# EAGLE board naiLED_eagle-pannel (EAGLE 8.2.2)
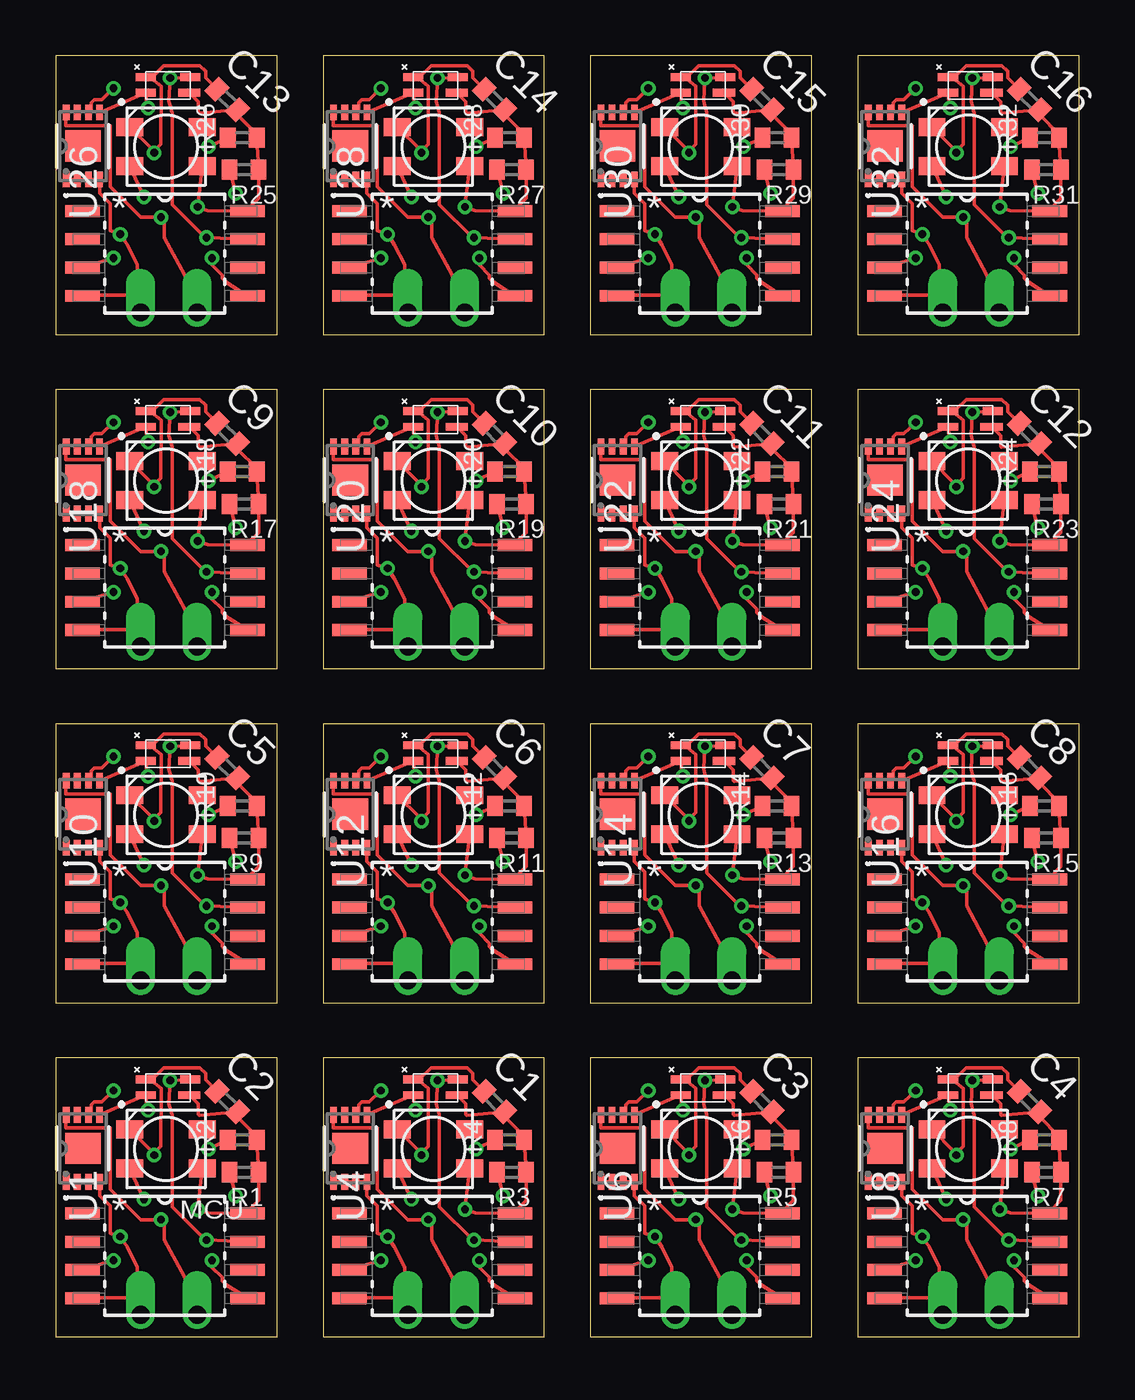
[diagram p0: board, top side]
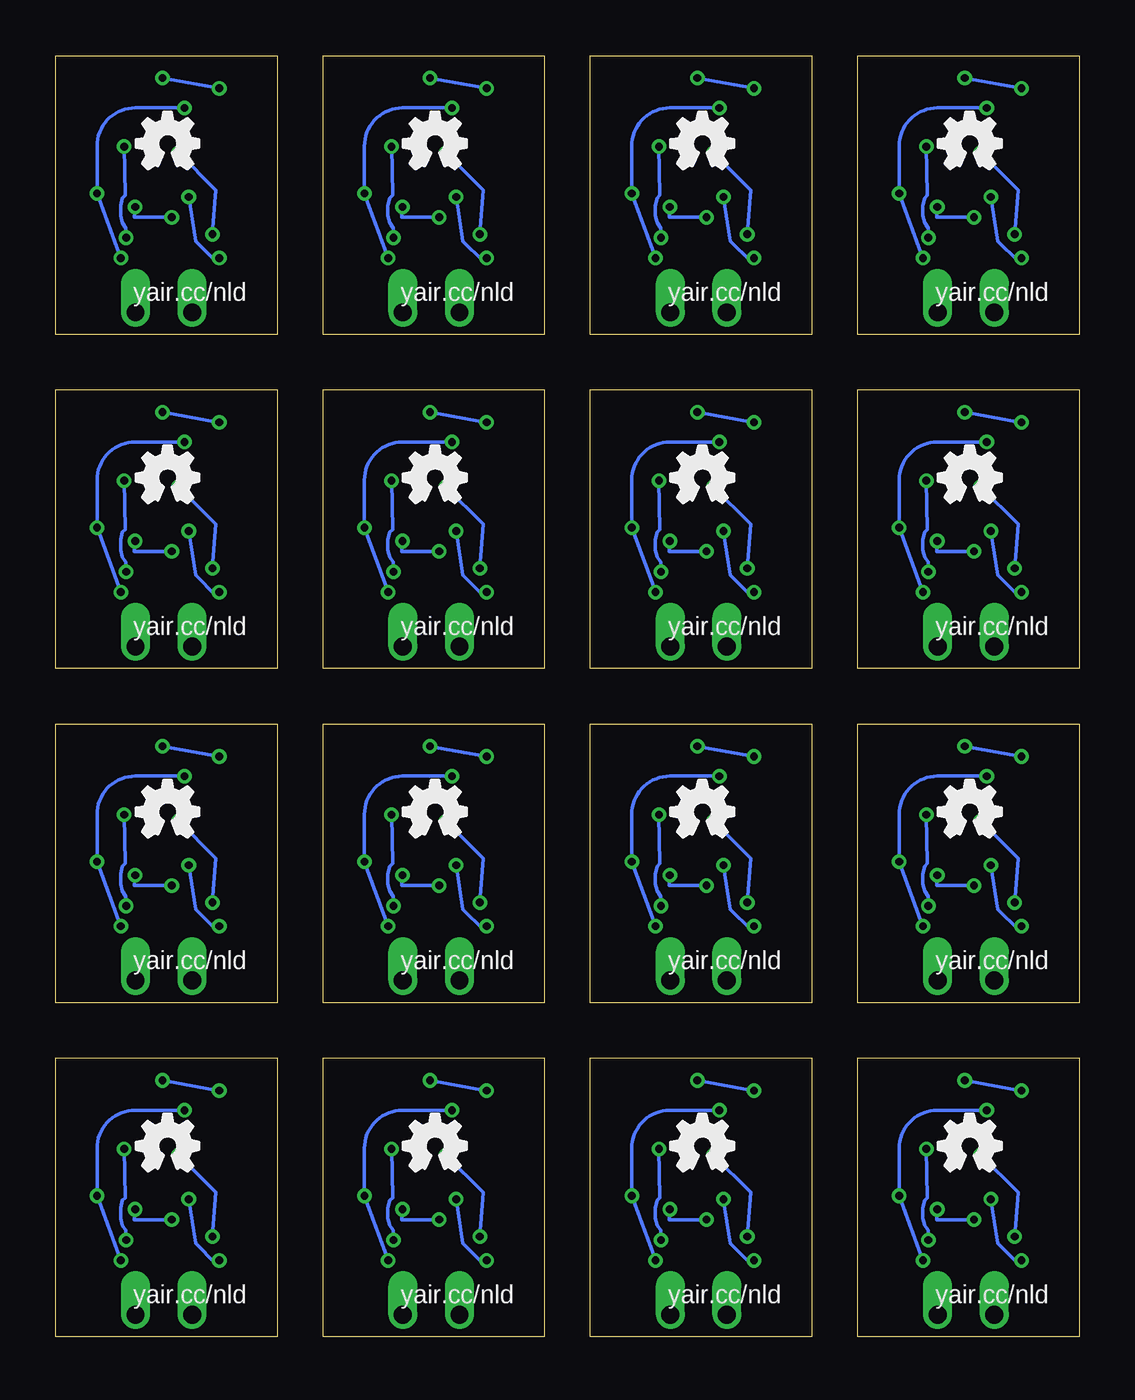
[diagram p1: board, bottom side, seen from below]

Size 45.93 x 57.52 mm. Coordinates in mm from the lower left corner, seen from the top.
Outline: 0,0 9.93,0 9.93,12.52 0,12.52 0,0
Outline: 12,0 21.93,0 21.93,12.52 12,12.52 12,0
Outline: 24,0 33.93,0 33.93,12.52 24,12.52 24,0
Outline: 36,0 45.93,0 45.93,12.52 36,12.52 36,0
Outline: 0,15 9.93,15 9.93,27.52 0,27.52 0,15
Outline: 12,15 21.93,15 21.93,27.52 12,27.52 12,15
Outline: 24,15 33.93,15 33.93,27.52 24,27.52 24,15
Outline: 36,15 45.93,15 45.93,27.52 36,27.52 36,15
Outline: 0,30 9.93,30 9.93,42.52 0,42.52 0,30
Outline: 12,30 21.93,30 21.93,42.52 12,42.52 12,30
Outline: 24,30 33.93,30 33.93,42.52 24,42.52 24,30
Outline: 36,30 45.93,30 45.93,42.52 36,42.52 36,30
Outline: 0,45 9.93,45 9.93,57.52 0,57.52 0,45
Outline: 12,45 21.93,45 21.93,57.52 12,57.52 12,45
Outline: 24,45 33.93,45 33.93,57.52 24,57.52 24,45
Outline: 36,45 45.93,45 45.93,57.52 36,57.52 36,45
Copper layers (1*16): Top 0.035mm / dielectric 1.5mm / Bottom 0.035mm
Design rules "Elecrow_2-layer_eagle_rule *": minimum track width 6mil, minimum drill 12mil, track to track 5mil, track to pad 5mil, pad to pad 5mil, via to via 5mil, smd to smd 0mil, copper to edge 10mil, drill to drill 10mil, minimum pad ring 10mil, minimum via ring 6mil, stop-mask expansion 2mil, vias tented up to drill 100mil, thermal gap 10mil

## Footprints (pad centres in the part's own frame; a part is rotated, then mirrored left to right if it is on the bottom)
C402 = smd 0.7 x 0.9: 1 -0.65,0; 2 0.65,0
R402 = smd 0.7 x 0.9: 1 -0.65,0; 2 0.65,0
8MA2 = smd 0.705 x 0.3: 1 -1.502,0.75; 2 -1.502,0.25; 3 -1.502,-0.25; 4 -1.502,-0.75; 5 1.502,-0.75; 6 1.502,-0.25; 7 1.502,0.25; 8 1.502,0.75 | smd 1.4 x 1.6: 9 0,0
SOIC127P798X216-8N = smd 1.549 x 0.533: 1 -3.708,1.905; 2 -3.708,0.635; 3 -3.708,-0.635; 4 -3.708,-1.905; 5 3.708,-1.905; 6 3.708,-0.635; 7 3.708,0.635; 8 3.708,1.905
LED-3535 = smd 1.2 x 0.8: 1 -1.625,0.875; 2 -1.625,-0.875; 3 1.625,-0.875; 4 1.625,0.875
4-TFLGA = smd 0.9 x 0.35: 1 -1.035,0.35; 2 -1.035,-0.35; 3 0.965,0.35 | smd 1 x 0.35: 4 0.915,-0.35
1X1_LONG = drill 0.8 offset: P$1 0,0

## Placement (x,y rotation side)
C1  [C402]  19.7,10.56 315 top
C2  [C402]  7.7,10.56 315 top
C3  [C402]  31.7,10.56 315 top
C4  [C402]  43.7,10.56 315 top
C5  [C402]  7.7,25.56 315 top
C6  [C402]  19.7,25.56 315 top
C7  [C402]  31.7,25.56 315 top
C8  [C402]  43.7,25.56 315 top
C9  [C402]  7.7,40.56 315 top
C10  [C402]  19.7,40.56 315 top
C11  [C402]  31.7,40.56 315 top
C12  [C402]  43.7,40.56 315 top
C13  [C402]  7.7,55.56 315 top
C14  [C402]  19.7,55.56 315 top
C15  [C402]  31.7,55.56 315 top
C16  [C402]  43.7,55.56 315 top
E$1  [OSHW_FILLX100_NOTEXT]  6.32,7.45 0 bottom
E$2  [OSHW_FILLX100_NOTEXT]  18.32,7.45 0 bottom
E$3  [OSHW_FILLX100_NOTEXT]  30.32,7.45 0 bottom
E$4  [OSHW_FILLX100_NOTEXT]  42.32,7.45 0 bottom
E$5  [OSHW_FILLX100_NOTEXT]  6.32,22.45 0 bottom
E$6  [OSHW_FILLX100_NOTEXT]  18.32,22.45 0 bottom
E$7  [OSHW_FILLX100_NOTEXT]  30.32,22.45 0 bottom
E$8  [OSHW_FILLX100_NOTEXT]  42.32,22.45 0 bottom
E$9  [OSHW_FILLX100_NOTEXT]  6.32,37.45 0 bottom
E$10  [OSHW_FILLX100_NOTEXT]  18.32,37.45 0 bottom
E$11  [OSHW_FILLX100_NOTEXT]  30.32,37.45 0 bottom
E$12  [OSHW_FILLX100_NOTEXT]  42.32,37.45 0 bottom
E$13  [OSHW_FILLX100_NOTEXT]  6.32,52.45 0 bottom
E$14  [OSHW_FILLX100_NOTEXT]  18.32,52.45 0 bottom
E$15  [OSHW_FILLX100_NOTEXT]  30.32,52.45 0 bottom
E$16  [OSHW_FILLX100_NOTEXT]  42.32,52.45 0 bottom
R1  [R402]  8.46,7.4 0 top
R2  [R402]  8.37,8.84 0 top
R3  [R402]  20.46,7.4 0 top
R4  [R402]  20.37,8.84 0 top
R5  [R402]  32.46,7.4 0 top
R6  [R402]  32.37,8.84 0 top
R7  [R402]  44.46,7.4 0 top
R8  [R402]  44.37,8.84 0 top
R9  [R402]  8.46,22.4 0 top
R10  [R402]  8.37,23.84 0 top
R11  [R402]  20.46,22.4 0 top
R12  [R402]  20.37,23.84 0 top
R13  [R402]  32.46,22.4 0 top
R14  [R402]  32.37,23.84 0 top
R15  [R402]  44.46,22.4 0 top
R16  [R402]  44.37,23.84 0 top
R17  [R402]  8.46,37.4 0 top
R18  [R402]  8.37,38.84 0 top
R19  [R402]  20.46,37.4 0 top
R20  [R402]  20.37,38.84 0 top
R21  [R402]  32.46,37.4 0 top
R22  [R402]  32.37,38.84 0 top
R23  [R402]  44.46,37.4 0 top
R24  [R402]  44.37,38.84 0 top
R25  [R402]  8.46,52.4 0 top
R26  [R402]  8.37,53.84 0 top
R27  [R402]  20.46,52.4 0 top
R28  [R402]  20.37,53.84 0 top
R29  [R402]  32.46,52.4 0 top
R30  [R402]  32.37,53.84 0 top
R31  [R402]  44.46,52.4 0 top
R32  [R402]  44.37,53.84 0 top
U1  AT24C256C-MAHL-T  [8MA2]  1.22,8.47 90 top
U2  ATTINY85-20SU  [SOIC127P798X216-8N]  16.9,3.64 0 top
U3  ATTINY85-20SU  [SOIC127P798X216-8N]  4.9,3.64 0 top
U4  AT24C256C-MAHL-T  [8MA2]  13.22,8.47 90 top
U5  ATTINY85-20SU  [SOIC127P798X216-8N]  28.9,3.64 0 top
U6  AT24C256C-MAHL-T  [8MA2]  25.22,8.47 90 top
U7  ATTINY85-20SU  [SOIC127P798X216-8N]  40.9,3.64 0 top
U8  AT24C256C-MAHL-T  [8MA2]  37.22,8.47 90 top
U9  ATTINY85-20SU  [SOIC127P798X216-8N]  4.9,18.64 0 top
U10  AT24C256C-MAHL-T  [8MA2]  1.22,23.47 90 top
U11  ATTINY85-20SU  [SOIC127P798X216-8N]  16.9,18.64 0 top
U12  AT24C256C-MAHL-T  [8MA2]  13.22,23.47 90 top
U13  ATTINY85-20SU  [SOIC127P798X216-8N]  28.9,18.64 0 top
U14  AT24C256C-MAHL-T  [8MA2]  25.22,23.47 90 top
U15  ATTINY85-20SU  [SOIC127P798X216-8N]  40.9,18.64 0 top
U16  AT24C256C-MAHL-T  [8MA2]  37.22,23.47 90 top
U17  ATTINY85-20SU  [SOIC127P798X216-8N]  4.9,33.64 0 top
U18  AT24C256C-MAHL-T  [8MA2]  1.22,38.47 90 top
U19  ATTINY85-20SU  [SOIC127P798X216-8N]  16.9,33.64 0 top
U20  AT24C256C-MAHL-T  [8MA2]  13.22,38.47 90 top
U21  ATTINY85-20SU  [SOIC127P798X216-8N]  28.9,33.64 0 top
U22  AT24C256C-MAHL-T  [8MA2]  25.22,38.47 90 top
U23  ATTINY85-20SU  [SOIC127P798X216-8N]  40.9,33.64 0 top
U24  AT24C256C-MAHL-T  [8MA2]  37.22,38.47 90 top
U25  ATTINY85-20SU  [SOIC127P798X216-8N]  4.9,48.64 0 top
U26  AT24C256C-MAHL-T  [8MA2]  1.22,53.47 90 top
U27  ATTINY85-20SU  [SOIC127P798X216-8N]  16.9,48.64 0 top
U28  AT24C256C-MAHL-T  [8MA2]  13.22,53.47 90 top
U29  ATTINY85-20SU  [SOIC127P798X216-8N]  28.9,48.64 0 top
U30  AT24C256C-MAHL-T  [8MA2]  25.22,53.47 90 top
U31  ATTINY85-20SU  [SOIC127P798X216-8N]  40.9,48.64 0 top
U32  AT24C256C-MAHL-T  [8MA2]  37.22,53.47 90 top
U$1  SK6812MINI  [LED-3535]  4.95,8.44 0 top
U$2  VEML6040  [4-TFLGA]  5.08,11.21 0 top
U$3  HEADER-1X1  [1X1_LONG]  3.81,1 180 top
U$4  SK6812MINI  [LED-3535]  16.95,8.44 0 top
U$5  VEML6040  [4-TFLGA]  17.08,11.21 0 top
U$6  HEADER-1X1  [1X1_LONG]  15.81,1 180 top
U$7  SK6812MINI  [LED-3535]  28.95,8.44 0 top
U$8  VEML6040  [4-TFLGA]  29.08,11.21 0 top
U$9  HEADER-1X1  [1X1_LONG]  27.81,1 180 top
U$10  SK6812MINI  [LED-3535]  40.95,8.44 0 top
U$11  VEML6040  [4-TFLGA]  41.08,11.21 0 top
U$12  HEADER-1X1  [1X1_LONG]  39.81,1 180 top
U$13  SK6812MINI  [LED-3535]  4.95,23.44 0 top
U$14  VEML6040  [4-TFLGA]  5.08,26.21 0 top
U$15  HEADER-1X1  [1X1_LONG]  3.81,16 180 top
U$16  SK6812MINI  [LED-3535]  16.95,23.44 0 top
U$17  VEML6040  [4-TFLGA]  17.08,26.21 0 top
U$18  HEADER-1X1  [1X1_LONG]  15.81,16 180 top
U$19  SK6812MINI  [LED-3535]  28.95,23.44 0 top
U$20  VEML6040  [4-TFLGA]  29.08,26.21 0 top
U$21  HEADER-1X1  [1X1_LONG]  27.81,16 180 top
U$22  SK6812MINI  [LED-3535]  40.95,23.44 0 top
U$23  VEML6040  [4-TFLGA]  41.08,26.21 0 top
U$24  HEADER-1X1  [1X1_LONG]  39.81,16 180 top
U$25  SK6812MINI  [LED-3535]  4.95,38.44 0 top
U$26  VEML6040  [4-TFLGA]  5.08,41.21 0 top
U$27  HEADER-1X1  [1X1_LONG]  3.81,31 180 top
U$28  SK6812MINI  [LED-3535]  16.95,38.44 0 top
U$29  VEML6040  [4-TFLGA]  17.08,41.21 0 top
U$30  HEADER-1X1  [1X1_LONG]  15.81,31 180 top
U$31  SK6812MINI  [LED-3535]  28.95,38.44 0 top
U$32  VEML6040  [4-TFLGA]  29.08,41.21 0 top
U$33  HEADER-1X1  [1X1_LONG]  27.81,31 180 top
U$34  SK6812MINI  [LED-3535]  40.95,38.44 0 top
U$35  VEML6040  [4-TFLGA]  41.08,41.21 0 top
U$36  HEADER-1X1  [1X1_LONG]  39.81,31 180 top
U$37  SK6812MINI  [LED-3535]  4.95,53.44 0 top
U$38  VEML6040  [4-TFLGA]  5.08,56.21 0 top
U$39  HEADER-1X1  [1X1_LONG]  3.81,46 180 top
U$40  SK6812MINI  [LED-3535]  16.95,53.44 0 top
U$41  VEML6040  [4-TFLGA]  17.08,56.21 0 top
U$42  HEADER-1X1  [1X1_LONG]  15.81,46 180 top
U$43  SK6812MINI  [LED-3535]  28.95,53.44 0 top
U$44  VEML6040  [4-TFLGA]  29.08,56.21 0 top
U$45  HEADER-1X1  [1X1_LONG]  27.81,46 180 top
U$46  SK6812MINI  [LED-3535]  40.95,53.44 0 top
U$47  VEML6040  [4-TFLGA]  41.08,56.21 0 top
U$48  HEADER-1X1  [1X1_LONG]  39.81,46 180 top
VCC  HEADER-1X1  [1X1_LONG]  6.35,1 180 top
VCC1  HEADER-1X1  [1X1_LONG]  18.35,1 180 top
VCC2  HEADER-1X1  [1X1_LONG]  30.35,1 180 top
VCC3  HEADER-1X1  [1X1_LONG]  42.35,1 180 top
VCC4  HEADER-1X1  [1X1_LONG]  6.35,16 180 top
VCC5  HEADER-1X1  [1X1_LONG]  18.35,16 180 top
VCC6  HEADER-1X1  [1X1_LONG]  30.35,16 180 top
VCC7  HEADER-1X1  [1X1_LONG]  42.35,16 180 top
VCC8  HEADER-1X1  [1X1_LONG]  6.35,31 180 top
VCC9  HEADER-1X1  [1X1_LONG]  18.35,31 180 top
VCC10  HEADER-1X1  [1X1_LONG]  30.35,31 180 top
VCC11  HEADER-1X1  [1X1_LONG]  42.35,31 180 top
VCC12  HEADER-1X1  [1X1_LONG]  6.35,46 180 top
VCC13  HEADER-1X1  [1X1_LONG]  18.35,46 180 top
VCC14  HEADER-1X1  [1X1_LONG]  30.35,46 180 top
VCC15  HEADER-1X1  [1X1_LONG]  42.35,46 180 top

## Library data of the parts
C1-C16 R1-R32 U$1-U$48 VCC VCC1-VCC15 = naiLED_eagle
E$1-E$16 = Logo
U1 U4 U6 U8 U10 U12 U14 U16 U18 U20 U22 U24 U26 U28 U30 U32 = naiLED_eagle; MANUFACTURER_PART_NUMBER: at24c256cmahlt; VENDOR: ATMEL
U2 U3 U5 U7 U9 U11 U13 U15 U17 U19 U21 U23 U25 U27 U29 U31 = naiLED_eagle; MPN: ATTINY85-20SU; OC_FARNELL: 1455164; OC_NEWARK: 58M3797; PACKAGE: SOIC-8; SUPPLIER: Atmel

## Nets
D0/PWM/MOSI/SDA: R1.1 U1.5 U3.5 U$2.2
D0/PWM/MOSI/SDA1: R3.1 U2.5 U4.5 U$5.2
D0/PWM/MOSI/SDA2: R5.1 U5.5 U6.5 U$8.2
D0/PWM/MOSI/SDA3: R7.1 U7.5 U8.5 U$11.2
D0/PWM/MOSI/SDA4: R9.1 U9.5 U10.5 U$14.2
D0/PWM/MOSI/SDA5: R11.1 U11.5 U12.5 U$17.2
D0/PWM/MOSI/SDA6: R13.1 U13.5 U14.5 U$20.2
D0/PWM/MOSI/SDA7: R15.1 U15.5 U16.5 U$23.2
D0/PWM/MOSI/SDA8: R17.1 U17.5 U18.5 U$26.2
D0/PWM/MOSI/SDA9: R19.1 U19.5 U20.5 U$29.2
D0/PWM/MOSI/SDA10: R21.1 U21.5 U22.5 U$32.2
D0/PWM/MOSI/SDA11: R23.1 U23.5 U24.5 U$35.2
D0/PWM/MOSI/SDA12: R25.1 U25.5 U26.5 U$38.2
D0/PWM/MOSI/SDA13: R27.1 U27.5 U28.5 U$41.2
D0/PWM/MOSI/SDA14: R29.1 U29.5 U30.5 U$44.2
D0/PWM/MOSI/SDA15: R31.1 U31.5 U32.5 U$47.2
D1/PWM/MISO: U3.6
D1/PWM/MISO1: U2.6
D1/PWM/MISO2: U5.6
D1/PWM/MISO3: U7.6
D1/PWM/MISO4: U9.6
D1/PWM/MISO5: U11.6
D1/PWM/MISO6: U13.6
D1/PWM/MISO7: U15.6
D1/PWM/MISO8: U17.6
D1/PWM/MISO9: U19.6
D1/PWM/MISO10: U21.6
D1/PWM/MISO11: U23.6
D1/PWM/MISO12: U25.6
D1/PWM/MISO13: U27.6
D1/PWM/MISO14: U29.6
D1/PWM/MISO15: U31.6
D2/A1/SCK/SCL: R2.1 U1.6 U3.7 U$2.3
D2/A1/SCK/SCL1: R4.1 U2.7 U4.6 U$5.3
D2/A1/SCK/SCL2: R6.1 U5.7 U6.6 U$8.3
D2/A1/SCK/SCL3: R8.1 U7.7 U8.6 U$11.3
D2/A1/SCK/SCL4: R10.1 U9.7 U10.6 U$14.3
D2/A1/SCK/SCL5: R12.1 U11.7 U12.6 U$17.3
D2/A1/SCK/SCL6: R14.1 U13.7 U14.6 U$20.3
D2/A1/SCK/SCL7: R16.1 U15.7 U16.6 U$23.3
D2/A1/SCK/SCL8: R18.1 U17.7 U18.6 U$26.3
D2/A1/SCK/SCL9: R20.1 U19.7 U20.6 U$29.3
D2/A1/SCK/SCL10: R22.1 U21.7 U22.6 U$32.3
D2/A1/SCK/SCL11: R24.1 U23.7 U24.6 U$35.3
D2/A1/SCK/SCL12: R26.1 U25.7 U26.6 U$38.3
D2/A1/SCK/SCL13: R28.1 U27.7 U28.6 U$41.3
D2/A1/SCK/SCL14: R30.1 U29.7 U30.6 U$44.3
D2/A1/SCK/SCL15: R32.1 U31.7 U32.6 U$47.3
D3/A1: U2.2
D3/A2: U5.2
D3/A3: U3.2
D3/A4: U7.2
D3/A5: U9.2
D3/A6: U11.2
D3/A7: U13.2
D3/A8: U15.2
D3/A9: U17.2
D3/A10: U19.2
D3/A11: U21.2
D3/A12: U23.2
D3/A13: U25.2
D3/A14: U27.2
D3/A15: U29.2
D3/A16: U31.2
D4/PWM: U3.3 U$1.2
D4/PWM1: U2.3 U$4.2
D4/PWM2: U5.3 U$7.2
D4/PWM3: U7.3 U$10.2
D4/PWM4: U9.3 U$13.2
D4/PWM5: U11.3 U$16.2
D4/PWM6: U13.3 U$19.2
D4/PWM7: U15.3 U$22.2
D4/PWM8: U17.3 U$25.2
D4/PWM9: U19.3 U$28.2
D4/PWM10: U21.3 U$31.2
D4/PWM11: U23.3 U$34.2
D4/PWM12: U25.3 U$37.2
D4/PWM13: U27.3 U$40.2
D4/PWM14: U29.3 U$43.2
D4/PWM15: U31.3 U$46.2
GND: C2.1 U1.1 U1.2 U1.3 U1.4 U3.4 U$1.1 U$2.1 U$3.P$1
GND1: C1.1 U2.4 U4.1 U4.2 U4.3 U4.4 U$4.1 U$5.1 U$6.P$1
GND2: C3.1 U5.4 U6.1 U6.2 U6.3 U6.4 U$7.1 U$8.1 U$9.P$1
GND3: C4.1 U7.4 U8.1 U8.2 U8.3 U8.4 U$10.1 U$11.1 U$12.P$1
GND4: C5.1 U9.4 U10.1 U10.2 U10.3 U10.4 U$13.1 U$14.1 U$15.P$1
GND5: C6.1 U11.4 U12.1 U12.2 U12.3 U12.4 U$16.1 U$17.1 U$18.P$1
GND6: C7.1 U13.4 U14.1 U14.2 U14.3 U14.4 U$19.1 U$20.1 U$21.P$1
GND7: C8.1 U15.4 U16.1 U16.2 U16.3 U16.4 U$22.1 U$23.1 U$24.P$1
GND8: C9.1 U17.4 U18.1 U18.2 U18.3 U18.4 U$25.1 U$26.1 U$27.P$1
GND9: C10.1 U19.4 U20.1 U20.2 U20.3 U20.4 U$28.1 U$29.1 U$30.P$1
GND10: C11.1 U21.4 U22.1 U22.2 U22.3 U22.4 U$31.1 U$32.1 U$33.P$1
GND11: C12.1 U23.4 U24.1 U24.2 U24.3 U24.4 U$34.1 U$35.1 U$36.P$1
GND12: C13.1 U25.4 U26.1 U26.2 U26.3 U26.4 U$37.1 U$38.1 U$39.P$1
GND13: C14.1 U27.4 U28.1 U28.2 U28.3 U28.4 U$40.1 U$41.1 U$42.P$1
GND14: C15.1 U29.4 U30.1 U30.2 U30.3 U30.4 U$43.1 U$44.1 U$45.P$1
GND15: C16.1 U31.4 U32.1 U32.2 U32.3 U32.4 U$46.1 U$47.1 U$48.P$1
NC: U3.1
NC1: U2.1
NC2: U5.1
NC3: U7.1
NC4: U9.1
NC5: U11.1
NC6: U13.1
NC7: U15.1
NC8: U17.1
NC9: U19.1
NC10: U21.1
NC11: U23.1
NC12: U25.1
NC13: U27.1
NC14: U29.1
NC15: U31.1
VCC: C2.2 R1.2 R2.2 U1.8 U3.8 U$1.3 U$2.4 VCC.P$1
VCC1: C1.2 R3.2 R4.2 U2.8 U4.8 U$4.3 U$5.4 VCC1.P$1
VCC2: C3.2 R5.2 R6.2 U5.8 U6.8 U$7.3 U$8.4 VCC2.P$1
VCC3: C4.2 R7.2 R8.2 U7.8 U8.8 U$10.3 U$11.4 VCC3.P$1
VCC4: C5.2 R9.2 R10.2 U9.8 U10.8 U$13.3 U$14.4 VCC4.P$1
VCC5: C6.2 R11.2 R12.2 U11.8 U12.8 U$16.3 U$17.4 VCC5.P$1
VCC6: C7.2 R13.2 R14.2 U13.8 U14.8 U$19.3 U$20.4 VCC6.P$1
VCC7: C8.2 R15.2 R16.2 U15.8 U16.8 U$22.3 U$23.4 VCC7.P$1
VCC8: C9.2 R17.2 R18.2 U17.8 U18.8 U$25.3 U$26.4 VCC8.P$1
VCC9: C10.2 R19.2 R20.2 U19.8 U20.8 U$28.3 U$29.4 VCC9.P$1
VCC10: C11.2 R21.2 R22.2 U21.8 U22.8 U$31.3 U$32.4 VCC10.P$1
VCC11: C12.2 R23.2 R24.2 U23.8 U24.8 U$34.3 U$35.4 VCC11.P$1
VCC12: C13.2 R25.2 R26.2 U25.8 U26.8 U$37.3 U$38.4 VCC12.P$1
VCC13: C14.2 R27.2 R28.2 U27.8 U28.8 U$40.3 U$41.4 VCC13.P$1
VCC14: C15.2 R29.2 R30.2 U29.8 U30.8 U$43.3 U$44.4 VCC14.P$1
VCC15: C16.2 R31.2 R32.2 U31.8 U32.8 U$46.3 U$47.4 VCC15.P$1

## Tracks (layer width: path | path; a pad name or v marks a point on that pad's centre or on a via)
D0/PWM/MOSI/SDA  (via drill 0.35)
  Top 0.152: U3.5 7.62,2.37 7.47,2.52 7.47,2.68 7.01,3.13 v7.01,3.44 | U1.5 U$2.2 4.12,10.14 v4.15,10.18 | v8.08,6.33 R1.1
  Bottom 0.152: v7.01,3.44 v8.08,6.33 8.08,8.47 arc90 6.37,10.18 v4.15,10.18
D0/PWM/MOSI/SDA1  (via drill 0.35)
  Top 0.152: U2.5 19.62,2.37 19.47,2.52 19.47,2.68 19.01,3.13 v19.01,3.44 | U4.5 U$5.2 16.11,10.14 v16.15,10.18 | v20.08,6.33 R3.1
  Bottom 0.152: v19.01,3.44 v20.08,6.33 20.08,8.47 arc90 18.37,10.18 v16.15,10.18
D0/PWM/MOSI/SDA2  (via drill 0.35)
  Top 0.152: U5.5 31.62,2.37 31.47,2.52 31.47,2.68 31.01,3.13 v31.01,3.44 | U6.5 U$8.2 28.11,10.14 v28.15,10.18 | v32.08,6.33 R5.1
  Bottom 0.152: v31.01,3.44 v32.08,6.33 32.08,8.47 arc90 30.37,10.18 v28.15,10.18
D0/PWM/MOSI/SDA3  (via drill 0.35)
  Top 0.152: U7.5 43.62,2.37 43.47,2.52 43.47,2.68 43.01,3.13 v43.01,3.44 | U8.5 U$11.2 40.12,10.14 v40.15,10.18 | v44.08,6.33 R7.1
  Bottom 0.152: v43.01,3.44 v44.08,6.33 44.08,8.47 arc90 42.37,10.18 v40.15,10.18
D0/PWM/MOSI/SDA4  (via drill 0.35)
  Top 0.152: U9.5 7.62,17.37 7.47,17.52 7.47,17.68 7.01,18.13 v7.01,18.44 | U10.5 U$14.2 4.12,25.14 v4.15,25.18 | v8.08,21.33 R9.1
  Bottom 0.152: v7.01,18.44 v8.08,21.33 8.08,23.47 arc90 6.37,25.18 v4.15,25.18
D0/PWM/MOSI/SDA5  (via drill 0.35)
  Top 0.152: U11.5 19.62,17.37 19.47,17.52 19.47,17.68 19.01,18.13 v19.01,18.44 | U12.5 U$17.2 16.11,25.14 v16.15,25.18 | v20.08,21.33 R11.1
  Bottom 0.152: v19.01,18.44 v20.08,21.33 20.08,23.47 arc90 18.37,25.18 v16.15,25.18
D0/PWM/MOSI/SDA6  (via drill 0.35)
  Top 0.152: U13.5 31.62,17.37 31.47,17.52 31.47,17.68 31.01,18.13 v31.01,18.44 | U14.5 U$20.2 28.11,25.14 v28.15,25.18 | v32.08,21.33 R13.1
  Bottom 0.152: v31.01,18.44 v32.08,21.33 32.08,23.47 arc90 30.37,25.18 v28.15,25.18
D0/PWM/MOSI/SDA7  (via drill 0.35)
  Top 0.152: U15.5 43.62,17.37 43.47,17.52 43.47,17.68 43.01,18.13 v43.01,18.44 | U16.5 U$23.2 40.12,25.14 v40.15,25.18 | v44.08,21.33 R15.1
  Bottom 0.152: v43.01,18.44 v44.08,21.33 44.08,23.47 arc90 42.37,25.18 v40.15,25.18
D0/PWM/MOSI/SDA8  (via drill 0.35)
  Top 0.152: U17.5 7.62,32.37 7.47,32.52 7.47,32.68 7.01,33.13 v7.01,33.44 | U18.5 U$26.2 4.12,40.14 v4.15,40.18 | v8.08,36.33 R17.1
  Bottom 0.152: v7.01,33.44 v8.08,36.33 8.08,38.47 arc90 6.37,40.18 v4.15,40.18
D0/PWM/MOSI/SDA9  (via drill 0.35)
  Top 0.152: U19.5 19.62,32.37 19.47,32.52 19.47,32.68 19.01,33.13 v19.01,33.44 | U20.5 U$29.2 16.11,40.14 v16.15,40.18 | v20.08,36.33 R19.1
  Bottom 0.152: v19.01,33.44 v20.08,36.33 20.08,38.47 arc90 18.37,40.18 v16.15,40.18
D0/PWM/MOSI/SDA10  (via drill 0.35)
  Top 0.152: U21.5 31.62,32.37 31.47,32.52 31.47,32.68 31.01,33.13 v31.01,33.44 | U22.5 U$32.2 28.11,40.14 v28.15,40.18 | v32.08,36.33 R21.1
  Bottom 0.152: v31.01,33.44 v32.08,36.33 32.08,38.47 arc90 30.37,40.18 v28.15,40.18
D0/PWM/MOSI/SDA11  (via drill 0.35)
  Top 0.152: U23.5 43.62,32.37 43.47,32.52 43.47,32.68 43.01,33.13 v43.01,33.44 | U24.5 U$35.2 40.12,40.14 v40.15,40.18 | v44.08,36.33 R23.1
  Bottom 0.152: v43.01,33.44 v44.08,36.33 44.08,38.47 arc90 42.37,40.18 v40.15,40.18
D0/PWM/MOSI/SDA12  (via drill 0.35)
  Top 0.152: U25.5 7.62,47.37 7.47,47.52 7.47,47.68 7.01,48.13 v7.01,48.44 | U26.5 U$38.2 4.12,55.14 v4.15,55.18 | v8.08,51.33 R25.1
  Bottom 0.152: v7.01,48.44 v8.08,51.33 8.08,53.47 arc90 6.37,55.18 v4.15,55.18
D0/PWM/MOSI/SDA13  (via drill 0.35)
  Top 0.152: U27.5 19.62,47.37 19.47,47.52 19.47,47.68 19.01,48.13 v19.01,48.44 | U28.5 U$41.2 16.11,55.14 v16.15,55.18 | v20.08,51.33 R27.1
  Bottom 0.152: v19.01,48.44 v20.08,51.33 20.08,53.47 arc90 18.37,55.18 v16.15,55.18
D0/PWM/MOSI/SDA14  (via drill 0.35)
  Top 0.152: U29.5 31.62,47.37 31.47,47.52 31.47,47.68 31.01,48.13 v31.01,48.44 | U30.5 U$44.2 28.11,55.14 v28.15,55.18 | v32.08,51.33 R29.1
  Bottom 0.152: v31.01,48.44 v32.08,51.33 32.08,53.47 arc90 30.37,55.18 v28.15,55.18
D0/PWM/MOSI/SDA15  (via drill 0.35)
  Top 0.152: U31.5 43.62,47.37 43.47,47.52 43.47,47.68 43.01,48.13 v43.01,48.44 | U32.5 U$47.2 40.12,55.14 v40.15,55.18 | v44.08,51.33 R31.1
  Bottom 0.152: v43.01,48.44 v44.08,51.33 44.08,53.47 arc90 42.37,55.18 v40.15,55.18
D2/A1/SCK/SCL  (via drill 0.35)
  Top 0.152: U3.7 v6.77,4.35 6.71,4.35 5.22,5.84 5.22,9.96 5.19,10.08 5.16,10.2 5.08,10.47 v5.14,11.52 | v6.86,8.44 R2.1 | 5.76,11.46 U$2.3 arc90 U$2.3 v5.14,11.52 | v2.59,11.06 2.07,10.55 1.73,10.55 1.59,10.42 1.59,10.09 U1.6 | 5.18,11.52 v5.14,11.52
  Bottom 0.152: v6.77,4.35 6.78,4.78 6.94,5.02 7.02,5.33 7.02,5.79 6.94,6.13 6.81,6.25 v6.86,8.44 | v5.14,11.52 v2.59,11.06
D2/A1/SCK/SCL1  (via drill 0.35)
  Top 0.152: U2.7 v18.77,4.35 18.71,4.35 17.22,5.84 17.22,9.96 17.19,10.08 17.16,10.2 17.08,10.47 v17.14,11.52 | v18.86,8.44 R4.1 | 17.76,11.46 U$5.3 arc90 U$5.3 v17.14,11.52 | v14.59,11.06 14.07,10.55 13.72,10.55 13.59,10.42 13.59,10.09 U4.6 | 17.18,11.52 v17.14,11.52
  Bottom 0.152: v18.77,4.35 18.78,4.78 18.94,5.02 19.02,5.33 19.02,5.79 18.94,6.13 18.81,6.25 v18.86,8.44 | v17.14,11.52 v14.59,11.06
D2/A1/SCK/SCL2  (via drill 0.35)
  Top 0.152: U5.7 v30.77,4.35 30.71,4.35 29.22,5.84 29.22,9.96 29.19,10.08 29.16,10.2 29.08,10.47 v29.14,11.52 | v30.86,8.44 R6.1 | 29.76,11.46 U$8.3 arc90 U$8.3 v29.14,11.52 | v26.59,11.06 26.07,10.55 25.73,10.55 25.59,10.42 25.59,10.09 U6.6 | 29.18,11.52 v29.14,11.52
  Bottom 0.152: v30.77,4.35 30.78,4.78 30.94,5.02 31.02,5.33 31.02,5.79 30.94,6.13 30.81,6.25 v30.86,8.44 | v29.14,11.52 v26.59,11.06
D2/A1/SCK/SCL3  (via drill 0.35)
  Top 0.152: U7.7 v42.77,4.35 42.71,4.35 41.22,5.84 41.22,9.96 41.19,10.08 41.16,10.2 41.08,10.47 v41.14,11.52 | v42.86,8.44 R8.1 | 41.76,11.46 U$11.3 arc90 U$11.3 v41.14,11.52 | v38.59,11.06 38.07,10.55 37.73,10.55 37.59,10.42 37.59,10.09 U8.6 | 41.18,11.52 v41.14,11.52
  Bottom 0.152: v42.77,4.35 42.78,4.78 42.94,5.02 43.02,5.33 43.02,5.79 42.94,6.13 42.81,6.25 v42.86,8.44 | v41.14,11.52 v38.59,11.06
D2/A1/SCK/SCL4  (via drill 0.35)
  Top 0.152: U9.7 v6.77,19.35 6.71,19.35 5.22,20.84 5.22,24.96 5.19,25.08 5.16,25.2 5.08,25.47 v5.14,26.52 | v6.86,23.44 R10.1 | 5.76,26.46 U$14.3 arc90 U$14.3 v5.14,26.52 | v2.59,26.06 2.07,25.55 1.73,25.55 1.59,25.42 1.59,25.09 U10.6 | 5.18,26.52 v5.14,26.52
  Bottom 0.152: v6.77,19.35 6.78,19.78 6.94,20.02 7.02,20.33 7.02,20.79 6.94,21.13 6.81,21.25 v6.86,23.44 | v5.14,26.52 v2.59,26.06
D2/A1/SCK/SCL5  (via drill 0.35)
  Top 0.152: U11.7 v18.77,19.35 18.71,19.35 17.22,20.84 17.22,24.96 17.19,25.08 17.16,25.2 17.08,25.47 v17.14,26.52 | v18.86,23.44 R12.1 | 17.76,26.46 U$17.3 arc90 U$17.3 v17.14,26.52 | v14.59,26.06 14.07,25.55 13.72,25.55 13.59,25.42 13.59,25.09 U12.6 | 17.18,26.52 v17.14,26.52
  Bottom 0.152: v18.77,19.35 18.78,19.78 18.94,20.02 19.02,20.33 19.02,20.79 18.94,21.13 18.81,21.25 v18.86,23.44 | v17.14,26.52 v14.59,26.06
D2/A1/SCK/SCL6  (via drill 0.35)
  Top 0.152: U13.7 v30.77,19.35 30.71,19.35 29.22,20.84 29.22,24.96 29.19,25.08 29.16,25.2 29.08,25.47 v29.14,26.52 | v30.86,23.44 R14.1 | 29.76,26.46 U$20.3 arc90 U$20.3 v29.14,26.52 | v26.59,26.06 26.07,25.55 25.73,25.55 25.59,25.42 25.59,25.09 U14.6 | 29.18,26.52 v29.14,26.52
  Bottom 0.152: v30.77,19.35 30.78,19.78 30.94,20.02 31.02,20.33 31.02,20.79 30.94,21.13 30.81,21.25 v30.86,23.44 | v29.14,26.52 v26.59,26.06
D2/A1/SCK/SCL7  (via drill 0.35)
  Top 0.152: U15.7 v42.77,19.35 42.71,19.35 41.22,20.84 41.22,24.96 41.19,25.08 41.16,25.2 41.08,25.47 v41.14,26.52 | v42.86,23.44 R16.1 | 41.76,26.46 U$23.3 arc90 U$23.3 v41.14,26.52 | v38.59,26.06 38.07,25.55 37.73,25.55 37.59,25.42 37.59,25.09 U16.6 | 41.18,26.52 v41.14,26.52
  Bottom 0.152: v42.77,19.35 42.78,19.78 42.94,20.02 43.02,20.33 43.02,20.79 42.94,21.13 42.81,21.25 v42.86,23.44 | v41.14,26.52 v38.59,26.06
D2/A1/SCK/SCL8  (via drill 0.35)
  Top 0.152: U17.7 v6.77,34.35 6.71,34.35 5.22,35.84 5.22,39.96 5.19,40.08 5.16,40.2 5.08,40.47 v5.14,41.52 | v6.86,38.44 R18.1 | 5.76,41.46 U$26.3 arc90 U$26.3 v5.14,41.52 | v2.59,41.06 2.07,40.55 1.73,40.55 1.59,40.42 1.59,40.09 U18.6 | 5.18,41.52 v5.14,41.52
  Bottom 0.152: v6.77,34.35 6.78,34.78 6.94,35.02 7.02,35.33 7.02,35.79 6.94,36.13 6.81,36.25 v6.86,38.44 | v5.14,41.52 v2.59,41.06
D2/A1/SCK/SCL9  (via drill 0.35)
  Top 0.152: U19.7 v18.77,34.35 18.71,34.35 17.22,35.84 17.22,39.96 17.19,40.08 17.16,40.2 17.08,40.47 v17.14,41.52 | v18.86,38.44 R20.1 | 17.76,41.46 U$29.3 arc90 U$29.3 v17.14,41.52 | v14.59,41.06 14.07,40.55 13.72,40.55 13.59,40.42 13.59,40.09 U20.6 | 17.18,41.52 v17.14,41.52
  Bottom 0.152: v18.77,34.35 18.78,34.78 18.94,35.02 19.02,35.33 19.02,35.79 18.94,36.13 18.81,36.25 v18.86,38.44 | v17.14,41.52 v14.59,41.06
D2/A1/SCK/SCL10  (via drill 0.35)
  Top 0.152: U21.7 v30.77,34.35 30.71,34.35 29.22,35.84 29.22,39.96 29.19,40.08 29.16,40.2 29.08,40.47 v29.14,41.52 | v30.86,38.44 R22.1 | 29.76,41.46 U$32.3 arc90 U$32.3 v29.14,41.52 | v26.59,41.06 26.07,40.55 25.73,40.55 25.59,40.42 25.59,40.09 U22.6 | 29.18,41.52 v29.14,41.52
  Bottom 0.152: v30.77,34.35 30.78,34.78 30.94,35.02 31.02,35.33 31.02,35.79 30.94,36.13 30.81,36.25 v30.86,38.44 | v29.14,41.52 v26.59,41.06
D2/A1/SCK/SCL11  (via drill 0.35)
  Top 0.152: U23.7 v42.77,34.35 42.71,34.35 41.22,35.84 41.22,39.96 41.19,40.08 41.16,40.2 41.08,40.47 v41.14,41.52 | v42.86,38.44 R24.1 | 41.76,41.46 U$35.3 arc90 U$35.3 v41.14,41.52 | v38.59,41.06 38.07,40.55 37.73,40.55 37.59,40.42 37.59,40.09 U24.6 | 41.18,41.52 v41.14,41.52
  Bottom 0.152: v42.77,34.35 42.78,34.78 42.94,35.02 43.02,35.33 43.02,35.79 42.94,36.13 42.81,36.25 v42.86,38.44 | v41.14,41.52 v38.59,41.06
D2/A1/SCK/SCL12  (via drill 0.35)
  Top 0.152: U25.7 v6.77,49.35 6.71,49.35 5.22,50.84 5.22,54.96 5.19,55.08 5.16,55.2 5.08,55.47 v5.14,56.52 | v6.86,53.44 R26.1 | 5.76,56.46 U$38.3 arc90 U$38.3 v5.14,56.52 | v2.59,56.06 2.07,55.55 1.73,55.55 1.59,55.42 1.59,55.09 U26.6 | 5.18,56.52 v5.14,56.52
  Bottom 0.152: v6.77,49.35 6.78,49.78 6.94,50.02 7.02,50.33 7.02,50.79 6.94,51.13 6.81,51.25 v6.86,53.44 | v5.14,56.52 v2.59,56.06
D2/A1/SCK/SCL13  (via drill 0.35)
  Top 0.152: U27.7 v18.77,49.35 18.71,49.35 17.22,50.84 17.22,54.96 17.19,55.08 17.16,55.2 17.08,55.47 v17.14,56.52 | v18.86,53.44 R28.1 | 17.76,56.46 U$41.3 arc90 U$41.3 v17.14,56.52 | v14.59,56.06 14.07,55.55 13.72,55.55 13.59,55.42 13.59,55.09 U28.6 | 17.18,56.52 v17.14,56.52
  Bottom 0.152: v18.77,49.35 18.78,49.78 18.94,50.02 19.02,50.33 19.02,50.79 18.94,51.13 18.81,51.25 v18.86,53.44 | v17.14,56.52 v14.59,56.06
D2/A1/SCK/SCL14  (via drill 0.35)
  Top 0.152: U29.7 v30.77,49.35 30.71,49.35 29.22,50.84 29.22,54.96 29.19,55.08 29.16,55.2 29.08,55.47 v29.14,56.52 | v30.86,53.44 R30.1 | 29.76,56.46 U$44.3 arc90 U$44.3 v29.14,56.52 | v26.59,56.06 26.07,55.55 25.73,55.55 25.59,55.42 25.59,55.09 U30.6 | 29.18,56.52 v29.14,56.52
  Bottom 0.152: v30.77,49.35 30.78,49.78 30.94,50.02 31.02,50.33 31.02,50.79 30.94,51.13 30.81,51.25 v30.86,53.44 | v29.14,56.52 v26.59,56.06
D2/A1/SCK/SCL15  (via drill 0.35)
  Top 0.152: U31.7 v42.77,49.35 42.71,49.35 41.22,50.84 41.22,54.96 41.19,55.08 41.16,55.2 41.08,55.47 v41.14,56.52 | v42.86,53.44 R32.1 | 41.76,56.46 U$47.3 arc90 U$47.3 v41.14,56.52 | v38.59,56.06 38.07,55.55 37.73,55.55 37.59,55.42 37.59,55.09 U32.6 | 41.18,56.52 v41.14,56.52
  Bottom 0.152: v42.77,49.35 42.78,49.78 42.94,50.02 43.02,50.33 43.02,50.79 42.94,51.13 42.81,51.25 v42.86,53.44 | v41.14,56.52 v38.59,56.06
D4/PWM  (via drill 0.35)
  Top 0.152: U3.3 v2.59,3.44 | U$1.2 v3.96,6.18
  Bottom 0.152: v2.59,3.44 2.74,3.29 3.66,4.2 v3.96,6.18
D4/PWM1  (via drill 0.35)
  Top 0.152: U2.3 v14.59,3.44 | U$4.2 v15.96,6.18
  Bottom 0.152: v14.59,3.44 14.74,3.29 15.66,4.2 v15.96,6.18
D4/PWM2  (via drill 0.35)
  Top 0.152: U5.3 v26.59,3.44 | U$7.2 v27.96,6.18
  Bottom 0.152: v26.59,3.44 26.74,3.29 27.66,4.2 v27.96,6.18
D4/PWM3  (via drill 0.35)
  Top 0.152: U7.3 v38.59,3.44 | U$10.2 v39.96,6.18
  Bottom 0.152: v38.59,3.44 38.74,3.29 39.66,4.2 v39.96,6.18
D4/PWM4  (via drill 0.35)
  Top 0.152: U9.3 v2.59,18.44 | U$13.2 v3.96,21.18
  Bottom 0.152: v2.59,18.44 2.74,18.29 3.66,19.2 v3.96,21.18
D4/PWM5  (via drill 0.35)
  Top 0.152: U11.3 v14.59,18.44 | U$16.2 v15.96,21.18
  Bottom 0.152: v14.59,18.44 14.74,18.29 15.66,19.2 v15.96,21.18
D4/PWM6  (via drill 0.35)
  Top 0.152: U13.3 v26.59,18.44 | U$19.2 v27.96,21.18
  Bottom 0.152: v26.59,18.44 26.74,18.29 27.66,19.2 v27.96,21.18
D4/PWM7  (via drill 0.35)
  Top 0.152: U15.3 v38.59,18.44 | U$22.2 v39.96,21.18
  Bottom 0.152: v38.59,18.44 38.74,18.29 39.66,19.2 v39.96,21.18
D4/PWM8  (via drill 0.35)
  Top 0.152: U17.3 v2.59,33.44 | U$25.2 v3.96,36.18
  Bottom 0.152: v2.59,33.44 2.74,33.29 3.66,34.2 v3.96,36.18
D4/PWM9  (via drill 0.35)
  Top 0.152: U19.3 v14.59,33.44 | U$28.2 v15.96,36.18
  Bottom 0.152: v14.59,33.44 14.74,33.29 15.66,34.2 v15.96,36.18
D4/PWM10  (via drill 0.35)
  Top 0.152: U21.3 v26.59,33.44 | U$31.2 v27.96,36.18
  Bottom 0.152: v26.59,33.44 26.74,33.29 27.66,34.2 v27.96,36.18
D4/PWM11  (via drill 0.35)
  Top 0.152: U23.3 v38.59,33.44 | U$34.2 v39.96,36.18
  Bottom 0.152: v38.59,33.44 38.74,33.29 39.66,34.2 v39.96,36.18
D4/PWM12  (via drill 0.35)
  Top 0.152: U25.3 v2.59,48.44 | U$37.2 v3.96,51.18
  Bottom 0.152: v2.59,48.44 2.74,48.29 3.66,49.2 v3.96,51.18
D4/PWM13  (via drill 0.35)
  Top 0.152: U27.3 v14.59,48.44 | U$40.2 v15.96,51.18
  Bottom 0.152: v14.59,48.44 14.74,48.29 15.66,49.2 v15.96,51.18
D4/PWM14  (via drill 0.35)
  Top 0.152: U29.3 v26.59,48.44 | U$43.2 v27.96,51.18
  Bottom 0.152: v26.59,48.44 26.74,48.29 27.66,49.2 v27.96,51.18
D4/PWM15  (via drill 0.35)
  Top 0.152: U31.3 v38.59,48.44 | U$46.2 v39.96,51.18
  Bottom 0.152: v38.59,48.44 38.74,48.29 39.66,49.2 v39.96,51.18
GND  (via drill 0.35)
  Top 0.152: 4.22,11.56 4.73,11.15 4.72,8.55 4.42,8.25 | U$1.1 4.33,8.31 4.42,8.31 4.42,8.25 | 4.42,8.25 v4.42,8.16 | C2.1 6.72,11.53 6.72,11.83 6.46,12.07 4.86,12.07 4.32,11.56 4.22,11.56 | 4.22,11.56 U$2.1 | U1.1 U1.2 U1.3 U1.4 1.97,6.35 2.44,5.88 2.44,4.66 v2.9,4.5 3.2,4.05 3.66,3.13 3.66,1.91 3.5,1.76 | 3.5,1.76 1.22,1.76 U3.4 | U$3.P$1 3.96,1.61 3.5,1.76
  Bottom 0.152: v4.42,8.16 2.74,6.49 v2.9,4.5
GND1  (via drill 0.35)
  Top 0.152: 16.22,11.56 16.73,11.15 16.72,8.55 16.42,8.25 | U$4.1 16.33,8.31 16.42,8.31 16.42,8.25 | 16.42,8.25 v16.42,8.16 | C1.1 18.72,11.53 18.72,11.83 18.46,12.07 16.86,12.07 16.32,11.56 16.22,11.56 | 16.22,11.56 U$5.1 | U4.1 U4.2 U4.3 U4.4 13.97,6.35 14.44,5.88 14.44,4.66 v14.9,4.5 15.2,4.05 15.66,3.13 15.66,1.91 15.51,1.76 | 15.51,1.76 13.22,1.76 U2.4 | U$6.P$1 15.96,1.61 15.51,1.76
  Bottom 0.152: v16.42,8.16 14.74,6.49 v14.9,4.5
GND2  (via drill 0.35)
  Top 0.152: 28.22,11.56 28.73,11.15 28.72,8.55 28.42,8.25 | U$7.1 28.33,8.31 28.42,8.31 28.42,8.25 | 28.42,8.25 v28.42,8.16 | C3.1 30.72,11.53 30.72,11.83 30.46,12.07 28.86,12.07 28.32,11.56 28.22,11.56 | 28.22,11.56 U$8.1 | U6.1 U6.2 U6.3 U6.4 25.97,6.35 26.44,5.88 26.44,4.66 v26.9,4.5 27.2,4.05 27.66,3.13 27.66,1.91 27.5,1.76 | 27.5,1.76 25.22,1.76 U5.4 | U$9.P$1 27.96,1.61 27.5,1.76
  Bottom 0.152: v28.42,8.16 26.74,6.49 v26.9,4.5
GND3  (via drill 0.35)
  Top 0.152: 40.22,11.56 40.73,11.15 40.72,8.55 40.42,8.25 | U$10.1 40.33,8.31 40.42,8.31 40.42,8.25 | 40.42,8.25 v40.42,8.16 | C4.1 42.72,11.53 42.72,11.83 42.46,12.07 40.86,12.07 40.32,11.56 40.22,11.56 | 40.22,11.56 U$11.1 | U8.1 U8.2 U8.3 U8.4 37.97,6.35 38.44,5.88 38.44,4.66 v38.9,4.5 39.2,4.05 39.66,3.13 39.66,1.91 39.51,1.76 | 39.51,1.76 37.22,1.76 U7.4 | U$12.P$1 39.96,1.61 39.51,1.76
  Bottom 0.152: v40.42,8.16 38.74,6.49 v38.9,4.5
GND4  (via drill 0.35)
  Top 0.152: 4.22,26.56 4.73,26.15 4.72,23.55 4.42,23.25 | U$13.1 4.33,23.32 4.42,23.32 4.42,23.25 | 4.42,23.25 v4.42,23.16 | C5.1 6.72,26.53 6.72,26.83 6.46,27.07 4.86,27.07 4.32,26.56 4.22,26.56 | 4.22,26.56 U$14.1 | U10.1 U10.2 U10.3 U10.4 1.97,21.35 2.44,20.88 2.44,19.66 v2.9,19.5 3.2,19.05 3.66,18.13 3.66,16.91 3.5,16.76 | 3.5,16.76 1.22,16.76 U9.4 | U$15.P$1 3.96,16.61 3.5,16.76
  Bottom 0.152: v4.42,23.16 2.74,21.49 v2.9,19.5
GND5  (via drill 0.35)
  Top 0.152: 16.22,26.56 16.73,26.15 16.72,23.55 16.42,23.25 | U$16.1 16.33,23.32 16.42,23.32 16.42,23.25 | 16.42,23.25 v16.42,23.16 | C6.1 18.72,26.53 18.72,26.83 18.46,27.07 16.86,27.07 16.32,26.56 16.22,26.56 | 16.22,26.56 U$17.1 | U12.1 U12.2 U12.3 U12.4 13.97,21.35 14.44,20.88 14.44,19.66 v14.9,19.5 15.2,19.05 15.66,18.13 15.66,16.91 15.51,16.76 | 15.51,16.76 13.22,16.76 U11.4 | U$18.P$1 15.96,16.61 15.51,16.76
  Bottom 0.152: v16.42,23.16 14.74,21.49 v14.9,19.5
GND6  (via drill 0.35)
  Top 0.152: 28.22,26.56 28.73,26.15 28.72,23.55 28.42,23.25 | U$19.1 28.33,23.32 28.42,23.32 28.42,23.25 | 28.42,23.25 v28.42,23.16 | C7.1 30.72,26.53 30.72,26.83 30.46,27.07 28.86,27.07 28.32,26.56 28.22,26.56 | 28.22,26.56 U$20.1 | U14.1 U14.2 U14.3 U14.4 25.97,21.35 26.44,20.88 26.44,19.66 v26.9,19.5 27.2,19.05 27.66,18.13 27.66,16.91 27.5,16.76 | 27.5,16.76 25.22,16.76 U13.4 | U$21.P$1 27.96,16.61 27.5,16.76
  Bottom 0.152: v28.42,23.16 26.74,21.49 v26.9,19.5
GND7  (via drill 0.35)
  Top 0.152: 40.22,26.56 40.73,26.15 40.72,23.55 40.42,23.25 | U$22.1 40.33,23.32 40.42,23.32 40.42,23.25 | 40.42,23.25 v40.42,23.16 | C8.1 42.72,26.53 42.72,26.83 42.46,27.07 40.86,27.07 40.32,26.56 40.22,26.56 | 40.22,26.56 U$23.1 | U16.1 U16.2 U16.3 U16.4 37.97,21.35 38.44,20.88 38.44,19.66 v38.9,19.5 39.2,19.05 39.66,18.13 39.66,16.91 39.51,16.76 | 39.51,16.76 37.22,16.76 U15.4 | U$24.P$1 39.96,16.61 39.51,16.76
  Bottom 0.152: v40.42,23.16 38.74,21.49 v38.9,19.5
GND8  (via drill 0.35)
  Top 0.152: 4.22,41.56 4.73,41.15 4.72,38.55 4.42,38.25 | U$25.1 4.33,38.31 4.42,38.31 4.42,38.25 | 4.42,38.25 v4.42,38.16 | C9.1 6.72,41.53 6.72,41.83 6.46,42.07 4.86,42.07 4.32,41.56 4.22,41.56 | 4.22,41.56 U$26.1 | U18.1 U18.2 U18.3 U18.4 1.97,36.35 2.44,35.88 2.44,34.66 v2.9,34.51 3.2,34.05 3.66,33.13 3.66,31.91 3.5,31.76 | 3.5,31.76 1.22,31.76 U17.4 | U$27.P$1 3.96,31.61 3.5,31.76
  Bottom 0.152: v4.42,38.16 2.74,36.49 v2.9,34.51
GND9  (via drill 0.35)
  Top 0.152: 16.22,41.56 16.73,41.15 16.72,38.55 16.42,38.25 | U$28.1 16.33,38.31 16.42,38.31 16.42,38.25 | 16.42,38.25 v16.42,38.16 | C10.1 18.72,41.53 18.72,41.83 18.46,42.07 16.86,42.07 16.32,41.56 16.22,41.56 | 16.22,41.56 U$29.1 | U20.1 U20.2 U20.3 U20.4 13.97,36.35 14.44,35.88 14.44,34.66 v14.9,34.51 15.2,34.05 15.66,33.13 15.66,31.91 15.51,31.76 | 15.51,31.76 13.22,31.76 U19.4 | U$30.P$1 15.96,31.61 15.51,31.76
  Bottom 0.152: v16.42,38.16 14.74,36.49 v14.9,34.51
GND10  (via drill 0.35)
  Top 0.152: 28.22,41.56 28.73,41.15 28.72,38.55 28.42,38.25 | U$31.1 28.33,38.31 28.42,38.31 28.42,38.25 | 28.42,38.25 v28.42,38.16 | C11.1 30.72,41.53 30.72,41.83 30.46,42.07 28.86,42.07 28.32,41.56 28.22,41.56 | 28.22,41.56 U$32.1 | U22.1 U22.2 U22.3 U22.4 25.97,36.35 26.44,35.88 26.44,34.66 v26.9,34.51 27.2,34.05 27.66,33.13 27.66,31.91 27.5,31.76 | 27.5,31.76 25.22,31.76 U21.4 | U$33.P$1 27.96,31.61 27.5,31.76
  Bottom 0.152: v28.42,38.16 26.74,36.49 v26.9,34.51
GND11  (via drill 0.35)
  Top 0.152: 40.22,41.56 40.73,41.15 40.72,38.55 40.42,38.25 | U$34.1 40.33,38.31 40.42,38.31 40.42,38.25 | 40.42,38.25 v40.42,38.16 | C12.1 42.72,41.53 42.72,41.83 42.46,42.07 40.86,42.07 40.32,41.56 40.22,41.56 | 40.22,41.56 U$35.1 | U24.1 U24.2 U24.3 U24.4 37.97,36.35 38.44,35.88 38.44,34.66 v38.9,34.51 39.2,34.05 39.66,33.13 39.66,31.91 39.51,31.76 | 39.51,31.76 37.22,31.76 U23.4 | U$36.P$1 39.96,31.61 39.51,31.76
  Bottom 0.152: v40.42,38.16 38.74,36.49 v38.9,34.51
GND12  (via drill 0.35)
  Top 0.152: 4.22,56.56 4.73,56.15 4.72,53.55 4.42,53.25 | U$37.1 4.33,53.31 4.42,53.31 4.42,53.25 | 4.42,53.25 v4.42,53.16 | C13.1 6.72,56.53 6.72,56.83 6.46,57.07 4.86,57.07 4.32,56.56 4.22,56.56 | 4.22,56.56 U$38.1 | U26.1 U26.2 U26.3 U26.4 1.97,51.35 2.44,50.88 2.44,49.66 v2.9,49.51 3.2,49.05 3.66,48.13 3.66,46.91 3.5,46.76 | 3.5,46.76 1.22,46.76 U25.4 | U$39.P$1 3.96,46.61 3.5,46.76
  Bottom 0.152: v4.42,53.16 2.74,51.49 v2.9,49.51
GND13  (via drill 0.35)
  Top 0.152: 16.22,56.56 16.73,56.15 16.72,53.55 16.42,53.25 | U$40.1 16.33,53.31 16.42,53.31 16.42,53.25 | 16.42,53.25 v16.42,53.16 | C14.1 18.72,56.53 18.72,56.83 18.46,57.07 16.86,57.07 16.32,56.56 16.22,56.56 | 16.22,56.56 U$41.1 | U28.1 U28.2 U28.3 U28.4 13.97,51.35 14.44,50.88 14.44,49.66 v14.9,49.51 15.2,49.05 15.66,48.13 15.66,46.91 15.51,46.76 | 15.51,46.76 13.22,46.76 U27.4 | U$42.P$1 15.96,46.61 15.51,46.76
  Bottom 0.152: v16.42,53.16 14.74,51.49 v14.9,49.51
GND14  (via drill 0.35)
  Top 0.152: 28.22,56.56 28.73,56.15 28.72,53.55 28.42,53.25 | U$43.1 28.33,53.31 28.42,53.31 28.42,53.25 | 28.42,53.25 v28.42,53.16 | C15.1 30.72,56.53 30.72,56.83 30.46,57.07 28.86,57.07 28.32,56.56 28.22,56.56 | 28.22,56.56 U$44.1 | U30.1 U30.2 U30.3 U30.4 25.97,51.35 26.44,50.88 26.44,49.66 v26.9,49.51 27.2,49.05 27.66,48.13 27.66,46.91 27.5,46.76 | 27.5,46.76 25.22,46.76 U29.4 | U$45.P$1 27.96,46.61 27.5,46.76
  Bottom 0.152: v28.42,53.16 26.74,51.49 v26.9,49.51
GND15  (via drill 0.35)
  Top 0.152: 40.22,56.56 40.73,56.15 40.72,53.55 40.42,53.25 | U$46.1 40.33,53.31 40.42,53.31 40.42,53.25 | 40.42,53.25 v40.42,53.16 | C16.1 42.72,56.53 42.72,56.83 42.46,57.07 40.86,57.07 40.32,56.56 40.22,56.56 | 40.22,56.56 U$47.1 | U32.1 U32.2 U32.3 U32.4 37.97,51.35 38.44,50.88 38.44,49.66 v38.9,49.51 39.2,49.05 39.66,48.13 39.66,46.91 39.51,46.76 | 39.51,46.76 37.22,46.76 U31.4 | U$48.P$1 39.96,46.61 39.51,46.76
  Bottom 0.152: v40.42,53.16 38.74,51.49 v38.9,49.51
VCC  (via drill 0.35)
  Top 0.152: 8.53,5.55 6.83,5.57 v6.37,5.73 U$1.3 | 8.53,5.55 U3.8 | U1.8 0.46,9.96 0.46,9.38 2.44,9.38 2.44,6.64 3.81,5.27 4.69,5.27 | U$2.4 6.4,10.46 6.4,9.99 6.44,9.95 C2.2 8.16,9.87 9.02,9.01 | 9.02,9.01 9.02,9.08 | 9.02,9.01 R2.2 R1.2 9.11,6.12 8.53,5.55 | 4.69,5.27 v4.72,5.27 | VCC.P$1 5.79,2.68 4.88,4.35 4.88,5.08 4.69,5.27
  Bottom 0.152: v4.72,5.27 6.4,5.27 v6.37,5.73
VCC1  (via drill 0.35)
  Top 0.152: 20.53,5.55 18.83,5.57 v18.37,5.73 U$4.3 | 20.53,5.55 U2.8 | U4.8 12.46,9.96 12.46,9.38 14.44,9.38 14.44,6.64 15.81,5.27 16.69,5.27 | U$5.4 18.4,10.46 18.4,9.99 18.44,9.95 C1.2 20.16,9.87 21.02,9.01 | 21.02,9.01 21.02,9.08 | 21.02,9.01 R4.2 R3.2 21.11,6.12 20.53,5.55 | 16.69,5.27 v16.72,5.27 | VCC1.P$1 17.79,2.68 16.88,4.35 16.88,5.08 16.69,5.27
  Bottom 0.152: v16.72,5.27 18.4,5.27 v18.37,5.73
VCC2  (via drill 0.35)
  Top 0.152: 32.53,5.55 30.83,5.57 v30.37,5.73 U$7.3 | 32.53,5.55 U5.8 | U6.8 24.46,9.96 24.46,9.38 26.44,9.38 26.44,6.64 27.81,5.27 28.69,5.27 | U$8.4 30.4,10.46 30.4,9.99 30.44,9.95 C3.2 32.16,9.87 33.02,9.01 | 33.02,9.01 33.02,9.08 | 33.02,9.01 R6.2 R5.2 33.11,6.12 32.53,5.55 | 28.69,5.27 v28.72,5.27 | VCC2.P$1 29.79,2.68 28.88,4.35 28.88,5.08 28.69,5.27
  Bottom 0.152: v28.72,5.27 30.4,5.27 v30.37,5.73
VCC3  (via drill 0.35)
  Top 0.152: 44.53,5.55 42.83,5.57 v42.37,5.73 U$10.3 | 44.53,5.55 U7.8 | U8.8 36.46,9.96 36.46,9.38 38.44,9.38 38.44,6.64 39.81,5.27 40.69,5.27 | U$11.4 42.4,10.46 42.4,9.99 42.44,9.95 C4.2 44.16,9.87 45.02,9.01 | 45.02,9.01 45.02,9.08 | 45.02,9.01 R8.2 R7.2 45.11,6.12 44.53,5.55 | 40.69,5.27 v40.72,5.27 | VCC3.P$1 41.79,2.68 40.88,4.35 40.88,5.08 40.69,5.27
  Bottom 0.152: v40.72,5.27 42.4,5.27 v42.37,5.73
VCC4  (via drill 0.35)
  Top 0.152: 8.53,20.55 6.83,20.57 v6.37,20.73 U$13.3 | 8.53,20.55 U9.8 | U10.8 0.46,24.96 0.46,24.38 2.44,24.38 2.44,21.64 3.81,20.27 4.69,20.27 | U$14.4 6.4,25.45 6.4,24.99 6.44,24.95 C5.2 8.16,24.87 9.02,24 | 9.02,24 9.02,24.08 | 9.02,24 R10.2 R9.2 9.11,21.12 8.53,20.55 | 4.69,20.27 v4.72,20.27 | VCC4.P$1 5.79,17.68 4.88,19.35 4.88,20.08 4.69,20.27
  Bottom 0.152: v4.72,20.27 6.4,20.27 v6.37,20.73
VCC5  (via drill 0.35)
  Top 0.152: 20.53,20.55 18.83,20.57 v18.37,20.73 U$16.3 | 20.53,20.55 U11.8 | U12.8 12.46,24.96 12.46,24.38 14.44,24.38 14.44,21.64 15.81,20.27 16.69,20.27 | U$17.4 18.4,25.45 18.4,24.99 18.44,24.95 C6.2 20.16,24.87 21.02,24 | 21.02,24 21.02,24.08 | 21.02,24 R12.2 R11.2 21.11,21.12 20.53,20.55 | 16.69,20.27 v16.72,20.27 | VCC5.P$1 17.79,17.68 16.88,19.35 16.88,20.08 16.69,20.27
  Bottom 0.152: v16.72,20.27 18.4,20.27 v18.37,20.73
VCC6  (via drill 0.35)
  Top 0.152: 32.53,20.55 30.83,20.57 v30.37,20.73 U$19.3 | 32.53,20.55 U13.8 | U14.8 24.46,24.96 24.46,24.38 26.44,24.38 26.44,21.64 27.81,20.27 28.69,20.27 | U$20.4 30.4,25.45 30.4,24.99 30.44,24.95 C7.2 32.16,24.87 33.02,24 | 33.02,24 33.02,24.08 | 33.02,24 R14.2 R13.2 33.11,21.12 32.53,20.55 | 28.69,20.27 v28.72,20.27 | VCC6.P$1 29.79,17.68 28.88,19.35 28.88,20.08 28.69,20.27
  Bottom 0.152: v28.72,20.27 30.4,20.27 v30.37,20.73
VCC7  (via drill 0.35)
  Top 0.152: 44.53,20.55 42.83,20.57 v42.37,20.73 U$22.3 | 44.53,20.55 U15.8 | U16.8 36.46,24.96 36.46,24.38 38.44,24.38 38.44,21.64 39.81,20.27 40.69,20.27 | U$23.4 42.4,25.45 42.4,24.99 42.44,24.95 C8.2 44.16,24.87 45.02,24 | 45.02,24 45.02,24.08 | 45.02,24 R16.2 R15.2 45.11,21.12 44.53,20.55 | 40.69,20.27 v40.72,20.27 | VCC7.P$1 41.79,17.68 40.88,19.35 40.88,20.08 40.69,20.27
  Bottom 0.152: v40.72,20.27 42.4,20.27 v42.37,20.73
VCC8  (via drill 0.35)
  Top 0.152: 8.53,35.55 6.83,35.57 v6.37,35.73 U$25.3 | 8.53,35.55 U17.8 | U18.8 0.46,39.96 0.46,39.38 2.44,39.38 2.44,36.64 3.81,35.27 4.69,35.27 | U$26.4 6.4,40.45 6.4,39.99 6.44,39.95 C9.2 8.16,39.87 9.02,39.01 | 9.02,39.01 9.02,39.08 | 9.02,39.01 R18.2 R17.2 9.11,36.12 8.53,35.55 | 4.69,35.27 v4.72,35.27 | VCC8.P$1 5.79,32.68 4.88,34.35 4.88,35.08 4.69,35.27
  Bottom 0.152: v4.72,35.27 6.4,35.27 v6.37,35.73
VCC9  (via drill 0.35)
  Top 0.152: 20.53,35.55 18.83,35.57 v18.37,35.73 U$28.3 | 20.53,35.55 U19.8 | U20.8 12.46,39.96 12.46,39.38 14.44,39.38 14.44,36.64 15.81,35.27 16.69,35.27 | U$29.4 18.4,40.45 18.4,39.99 18.44,39.95 C10.2 20.16,39.87 21.02,39.01 | 21.02,39.01 21.02,39.08 | 21.02,39.01 R20.2 R19.2 21.11,36.12 20.53,35.55 | 16.69,35.27 v16.72,35.27 | VCC9.P$1 17.79,32.68 16.88,34.35 16.88,35.08 16.69,35.27
  Bottom 0.152: v16.72,35.27 18.4,35.27 v18.37,35.73
VCC10  (via drill 0.35)
  Top 0.152: 32.53,35.55 30.83,35.57 v30.37,35.73 U$31.3 | 32.53,35.55 U21.8 | U22.8 24.46,39.96 24.46,39.38 26.44,39.38 26.44,36.64 27.81,35.27 28.69,35.27 | U$32.4 30.4,40.45 30.4,39.99 30.44,39.95 C11.2 32.16,39.87 33.02,39.01 | 33.02,39.01 33.02,39.08 | 33.02,39.01 R22.2 R21.2 33.11,36.12 32.53,35.55 | 28.69,35.27 v28.72,35.27 | VCC10.P$1 29.79,32.68 28.88,34.35 28.88,35.08 28.69,35.27
  Bottom 0.152: v28.72,35.27 30.4,35.27 v30.37,35.73
VCC11  (via drill 0.35)
  Top 0.152: 44.53,35.55 42.83,35.57 v42.37,35.73 U$34.3 | 44.53,35.55 U23.8 | U24.8 36.46,39.96 36.46,39.38 38.44,39.38 38.44,36.64 39.81,35.27 40.69,35.27 | U$35.4 42.4,40.45 42.4,39.99 42.44,39.95 C12.2 44.16,39.87 45.02,39.01 | 45.02,39.01 45.02,39.08 | 45.02,39.01 R24.2 R23.2 45.11,36.12 44.53,35.55 | 40.69,35.27 v40.72,35.27 | VCC11.P$1 41.79,32.68 40.88,34.35 40.88,35.08 40.69,35.27
  Bottom 0.152: v40.72,35.27 42.4,35.27 v42.37,35.73
VCC12  (via drill 0.35)
  Top 0.152: 8.53,50.55 6.83,50.57 v6.37,50.73 U$37.3 | 8.53,50.55 U25.8 | U26.8 0.46,54.96 0.46,54.38 2.44,54.38 2.44,51.64 3.81,50.27 4.69,50.27 | U$38.4 6.4,55.45 6.4,54.99 6.44,54.95 C13.2 8.16,54.87 9.02,54.01 | 9.02,54.01 9.02,54.08 | 9.02,54.01 R26.2 R25.2 9.11,51.12 8.53,50.55 | 4.69,50.27 v4.72,50.27 | VCC12.P$1 5.79,47.68 4.88,49.35 4.88,50.08 4.69,50.27
  Bottom 0.152: v4.72,50.27 6.4,50.27 v6.37,50.73
VCC13  (via drill 0.35)
  Top 0.152: 20.53,50.55 18.83,50.57 v18.37,50.73 U$40.3 | 20.53,50.55 U27.8 | U28.8 12.46,54.96 12.46,54.38 14.44,54.38 14.44,51.64 15.81,50.27 16.69,50.27 | U$41.4 18.4,55.45 18.4,54.99 18.44,54.95 C14.2 20.16,54.87 21.02,54.01 | 21.02,54.01 21.02,54.08 | 21.02,54.01 R28.2 R27.2 21.11,51.12 20.53,50.55 | 16.69,50.27 v16.72,50.27 | VCC13.P$1 17.79,47.68 16.88,49.35 16.88,50.08 16.69,50.27
  Bottom 0.152: v16.72,50.27 18.4,50.27 v18.37,50.73
VCC14  (via drill 0.35)
  Top 0.152: 32.53,50.55 30.83,50.57 v30.37,50.73 U$43.3 | 32.53,50.55 U29.8 | U30.8 24.46,54.96 24.46,54.38 26.44,54.38 26.44,51.64 27.81,50.27 28.69,50.27 | U$44.4 30.4,55.45 30.4,54.99 30.44,54.95 C15.2 32.16,54.87 33.02,54.01 | 33.02,54.01 33.02,54.08 | 33.02,54.01 R30.2 R29.2 33.11,51.12 32.53,50.55 | 28.69,50.27 v28.72,50.27 | VCC14.P$1 29.79,47.68 28.88,49.35 28.88,50.08 28.69,50.27
  Bottom 0.152: v28.72,50.27 30.4,50.27 v30.37,50.73
VCC15  (via drill 0.35)
  Top 0.152: 44.53,50.55 42.83,50.57 v42.37,50.73 U$46.3 | 44.53,50.55 U31.8 | U32.8 36.46,54.96 36.46,54.38 38.44,54.38 38.44,51.64 39.81,50.27 40.69,50.27 | U$47.4 42.4,55.45 42.4,54.99 42.44,54.95 C16.2 44.16,54.87 45.02,54.01 | 45.02,54.01 45.02,54.08 | 45.02,54.01 R32.2 R31.2 45.11,51.12 44.53,50.55 | 40.69,50.27 v40.72,50.27 | VCC15.P$1 41.79,47.68 40.88,49.35 40.88,50.08 40.69,50.27
  Bottom 0.152: v40.72,50.27 42.4,50.27 v42.37,50.73

## Text on the board
bPlace: yair.cc/nld | yair.cc/nld | yair.cc/nld | yair.cc/nld | yair.cc/nld | yair.cc/nld | yair.cc/nld | yair.cc/nld | yair.cc/nld | yair.cc/nld | yair.cc/nld | yair.cc/nld | yair.cc/nld | yair.cc/nld | yair.cc/nld | yair.cc/nld
tNames: MCU